# EAGLE board Trilife_5 (EAGLE 6.1)
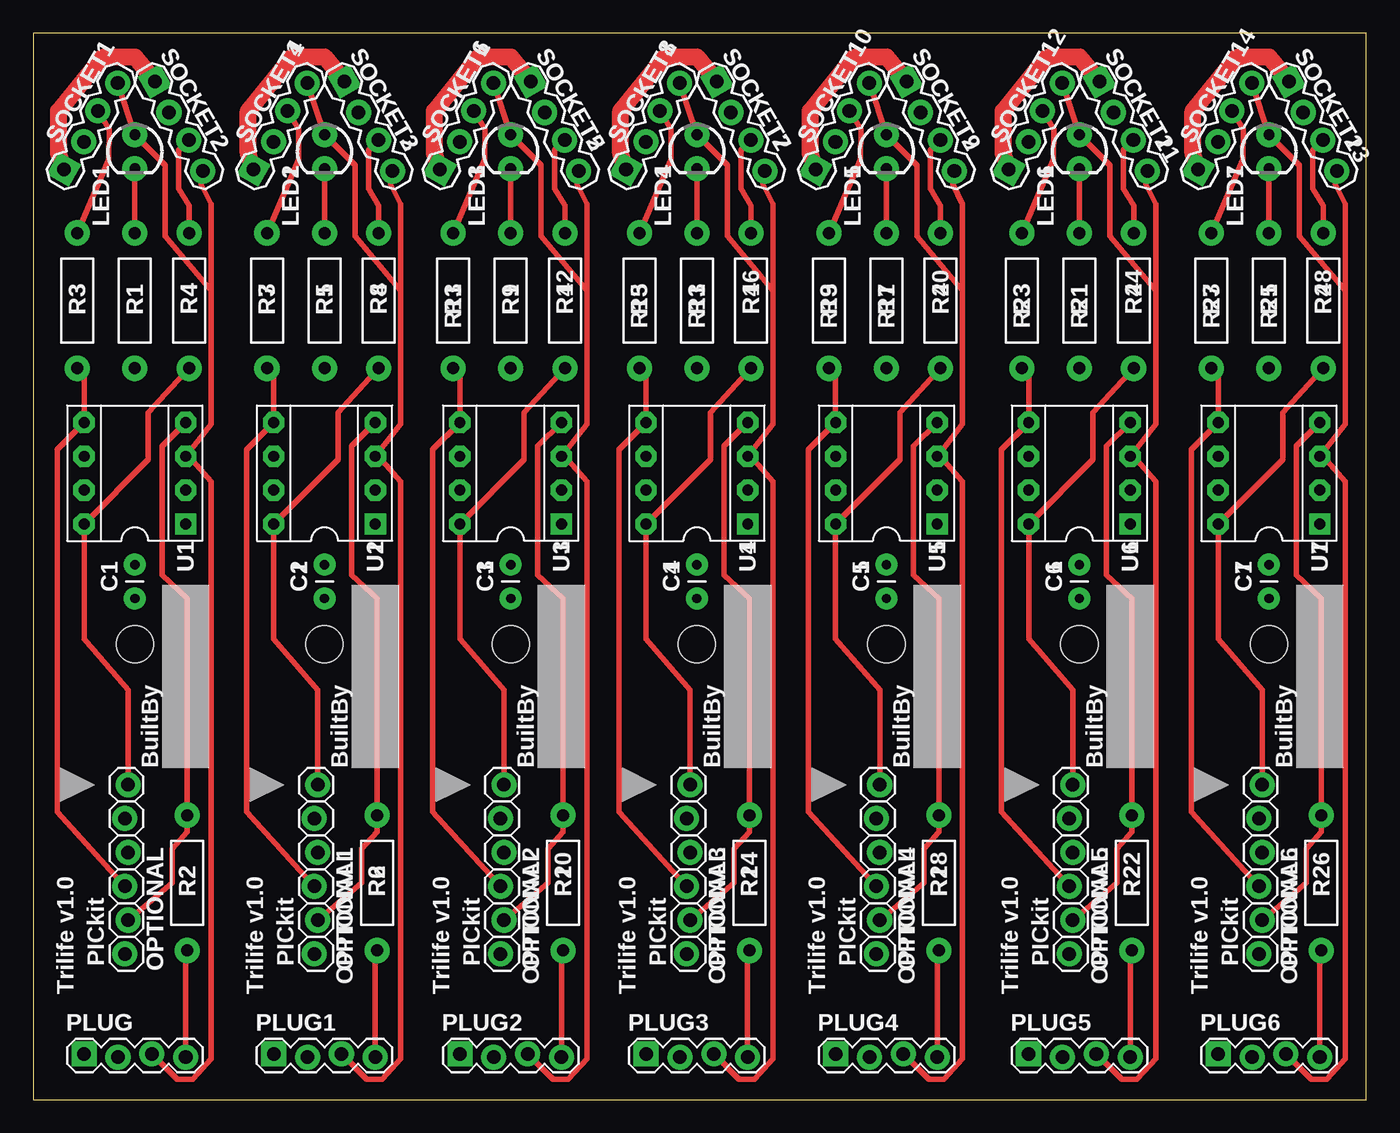
[diagram p0: board, top side]
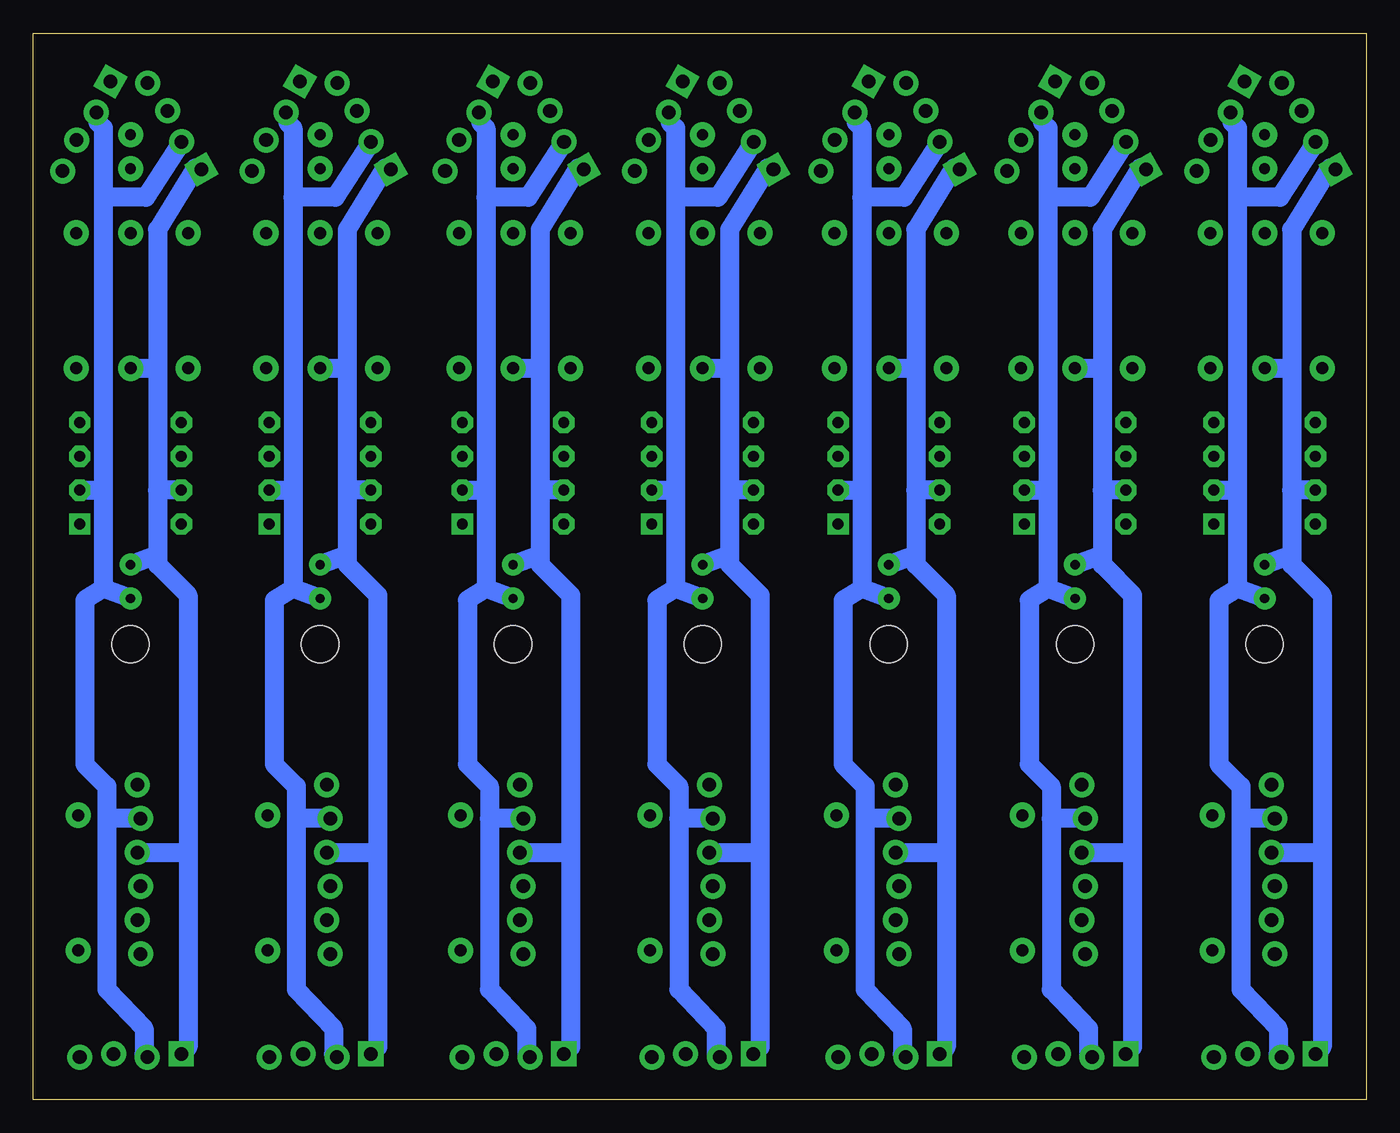
[diagram p1: board, bottom side, seen from below]

Size 100 x 80 mm. Coordinates in mm from the lower left corner, seen from the top.
Outline: 0,0 100,0 100,80 0,80 0,0
Copper layers (1*16): Top 0.035mm / dielectric 1.5mm / Bottom 0.035mm
Design rules: minimum track width 10mil, minimum drill 24mil, track to track 8mil, track to pad 8mil, pad to pad 8mil, via to via 8mil, smd to smd 8mil, copper to edge 40mil, drill to drill 8mil, minimum pad ring 10mil, minimum via ring 8mil, stop-mask expansion 4mil, vias tented up to drill 0mil, thermal gap 10mil
Holes 2.8 mm at 7.62,34.16 21.84,34.16 35.81,34.16 49.78,34.16 64.01,34.16 78.49,34.16 92.71,34.16

## Footprints (pad centres in the part's own frame; a part is rotated, then mirrored left to right if it is on the bottom)
CAP-PTH-SMALL = drill 0.7 pad 1.651: 1 0,0; 2 2.54,0
LED3MM = drill 0.813 pad 1.88: A -1.27,0; K 1.27,0
1X06_LOCK = drill 1.016 pad 1.88: 1 0,0; 2 2.54,-0.254; 3 5.08,0; 4 7.62,-0.254; 5 10.16,0; 6 12.7,-0.254
1X04_LOCK = drill 1.016 pad 1.88 square: 1 0,0.127 | drill 1.016 pad 1.88: 2 2.54,-0.127; 3 5.08,0.127; 4 7.62,-0.127
AXIAL-0.4 = drill 0.9 pad 1.88: P$1 -5.08,0; P$2 5.08,0
DIP-8 = drill 0.813 pad 1.6 square: 1 -3.81,3.81 | drill 0.813 pad 1.6 octagon: 2 -3.81,1.27; 3 -3.81,-1.27; 4 -3.81,-3.81; 5 3.81,-3.81; 6 3.81,-1.27; 7 3.81,1.27; 8 3.81,3.81

## Placement (x,y rotation side)
C1  [CAP-PTH-SMALL]  7.62,37.59 90 top
C2  [CAP-PTH-SMALL]  21.84,37.59 90 top
C3  [CAP-PTH-SMALL]  35.81,37.59 90 top
C4  [CAP-PTH-SMALL]  49.78,37.59 90 top
C5  [CAP-PTH-SMALL]  64.01,37.59 90 top
C6  [CAP-PTH-SMALL]  78.49,37.59 90 top
C7  [CAP-PTH-SMALL]  92.71,37.59 90 top
LED1  [LED3MM]  7.62,71.12 270 top
LED2  [LED3MM]  21.84,71.12 270 top
LED3  [LED3MM]  35.81,71.12 270 top
LED4  [LED3MM]  49.78,71.12 270 top
LED5  [LED3MM]  64.01,71.12 270 top
LED6  [LED3MM]  78.49,71.12 270 top
LED7  [LED3MM]  92.71,71.12 270 top
OPTIONAL  [1X06_LOCK]  7.11,23.62 270 top
OPTIONAL1  [1X06_LOCK]  21.34,23.62 270 top
OPTIONAL2  [1X06_LOCK]  35.31,23.62 270 top
OPTIONAL3  [1X06_LOCK]  49.28,23.62 270 top
OPTIONAL4  [1X06_LOCK]  63.5,23.62 270 top
OPTIONAL5  [1X06_LOCK]  77.98,23.62 270 top
OPTIONAL6  [1X06_LOCK]  92.2,23.62 270 top
PLUG  [1X04_LOCK]  3.81,3.3 0 top
PLUG1  [1X04_LOCK]  18.03,3.3 0 top
PLUG2  [1X04_LOCK]  32,3.3 0 top
PLUG3  [1X04_LOCK]  45.97,3.3 0 top
PLUG4  [1X04_LOCK]  60.2,3.3 0 top
PLUG5  [1X04_LOCK]  74.68,3.3 0 top
PLUG6  [1X04_LOCK]  88.9,3.3 0 top
R1  [AXIAL-0.4]  7.62,59.94 270 top
R2  [AXIAL-0.4]  11.56,16.26 90 top
R3  [AXIAL-0.4]  3.3,59.94 270 top
R4  [AXIAL-0.4]  11.68,59.94 90 top
R5  [AXIAL-0.4]  21.84,59.94 270 top
R6  [AXIAL-0.4]  25.78,16.26 90 top
R7  [AXIAL-0.4]  17.53,59.94 270 top
R8  [AXIAL-0.4]  25.91,59.94 90 top
R9  [AXIAL-0.4]  35.81,59.94 270 top
R10  [AXIAL-0.4]  39.75,16.26 90 top
R11  [AXIAL-0.4]  31.5,59.94 270 top
R12  [AXIAL-0.4]  39.88,59.94 90 top
R13  [AXIAL-0.4]  49.78,59.94 270 top
R14  [AXIAL-0.4]  53.72,16.26 90 top
R15  [AXIAL-0.4]  45.47,59.94 270 top
R16  [AXIAL-0.4]  53.85,59.94 90 top
R17  [AXIAL-0.4]  64.01,59.94 270 top
R18  [AXIAL-0.4]  67.94,16.26 90 top
R19  [AXIAL-0.4]  59.69,59.94 270 top
R20  [AXIAL-0.4]  68.07,59.94 90 top
R21  [AXIAL-0.4]  78.49,59.94 270 top
R22  [AXIAL-0.4]  82.42,16.26 90 top
R23  [AXIAL-0.4]  74.17,59.94 270 top
R24  [AXIAL-0.4]  82.55,59.94 90 top
R25  [AXIAL-0.4]  92.71,59.94 270 top
R26  [AXIAL-0.4]  96.65,16.26 90 top
R27  [AXIAL-0.4]  88.39,59.94 270 top
R28  [AXIAL-0.4]  96.77,59.94 90 top
SOCKET1  [1X04_LOCK]  2.41,69.72 60 top
SOCKET2  [1X04_LOCK]  9.02,76.33 300 top
SOCKET3  [1X04_LOCK]  23.24,76.33 300 top
SOCKET4  [1X04_LOCK]  16.64,69.72 60 top
SOCKET5  [1X04_LOCK]  37.21,76.33 300 top
SOCKET6  [1X04_LOCK]  30.61,69.72 60 top
SOCKET7  [1X04_LOCK]  51.18,76.33 300 top
SOCKET8  [1X04_LOCK]  44.58,69.72 60 top
SOCKET9  [1X04_LOCK]  65.41,76.33 300 top
SOCKET10  [1X04_LOCK]  58.8,69.72 60 top
SOCKET11  [1X04_LOCK]  79.88,76.33 300 top
SOCKET12  [1X04_LOCK]  73.28,69.72 60 top
SOCKET13  [1X04_LOCK]  94.11,76.33 300 top
SOCKET14  [1X04_LOCK]  87.5,69.72 60 top
U1  PIC10F322P  [DIP-8]  7.62,46.99 180 top
U2  PIC10F322P  [DIP-8]  21.84,46.99 180 top
U3  PIC10F322P  [DIP-8]  35.81,46.99 180 top
U4  PIC10F322P  [DIP-8]  49.78,46.99 180 top
U5  PIC10F322P  [DIP-8]  64.01,46.99 180 top
U6  PIC10F322P  [DIP-8]  78.49,46.99 180 top
U7  PIC10F322P  [DIP-8]  92.71,46.99 180 top

## Library data of the parts
C1-C7 LED1-LED7 PLUG PLUG1-PLUG6 R1-R28 SOCKET1-SOCKET14 = SparkFun
OPTIONAL OPTIONAL1-OPTIONAL6 U1-U7 = CindysStuff

## Nets
5V: C1.1 OPTIONAL.2 PLUG.2 SOCKET1.2 SOCKET2.2 U1.2
5V1: C2.1 OPTIONAL1.2 PLUG1.2 SOCKET3.2 SOCKET4.2 U2.2
5V2: C3.1 OPTIONAL2.2 PLUG2.2 SOCKET5.2 SOCKET6.2 U3.2
5V3: C4.1 OPTIONAL3.2 PLUG3.2 SOCKET7.2 SOCKET8.2 U4.2
5V4: C5.1 OPTIONAL4.2 PLUG4.2 SOCKET9.2 SOCKET10.2 U5.2
5V5: C6.1 OPTIONAL5.2 PLUG5.2 SOCKET11.2 SOCKET12.2 U6.2
5V6: C7.1 OPTIONAL6.2 PLUG6.2 SOCKET13.2 SOCKET14.2 U7.2
GND: C1.2 OPTIONAL.3 PLUG.1 R1.P$2 SOCKET1.1 SOCKET2.1 U1.7
GND1: C2.2 OPTIONAL1.3 PLUG1.1 R5.P$2 SOCKET3.1 SOCKET4.1 U2.7
GND2: C3.2 OPTIONAL2.3 PLUG2.1 R9.P$2 SOCKET5.1 SOCKET6.1 U3.7
GND3: C4.2 OPTIONAL3.3 PLUG3.1 R13.P$2 SOCKET7.1 SOCKET8.1 U4.7
GND4: C5.2 OPTIONAL4.3 PLUG4.1 R17.P$2 SOCKET9.1 SOCKET10.1 U5.7
GND5: C6.2 OPTIONAL5.3 PLUG5.1 R21.P$2 SOCKET11.1 SOCKET12.1 U6.7
GND6: C7.2 OPTIONAL6.3 PLUG6.1 R25.P$2 SOCKET13.1 SOCKET14.1 U7.7
N$1: LED1.A PLUG.3 SOCKET1.4 SOCKET2.4 U1.3
N$2: LED1.K R1.P$1
N$3: OPTIONAL.1 R4.P$1 U1.8
N$4: OPTIONAL.4 R3.P$2 U1.5
N$5: OPTIONAL.5 R2.P$2 U1.4
N$6: R4.P$2 SOCKET2.3
N$7: OPTIONAL1.1 R8.P$1 U2.8
N$8: R3.P$1 SOCKET1.3
N$9: PLUG.4 R2.P$1
N$10: OPTIONAL1.4 R7.P$2 U2.5
N$11: OPTIONAL1.5 R6.P$2 U2.4
N$12: LED2.A PLUG1.3 SOCKET3.4 SOCKET4.4 U2.3
N$13: LED2.K R5.P$1
N$14: R8.P$2 SOCKET3.3
N$15: R7.P$1 SOCKET4.3
N$16: PLUG1.4 R6.P$1
N$17: OPTIONAL2.1 R12.P$1 U3.8
N$18: OPTIONAL2.4 R11.P$2 U3.5
N$19: OPTIONAL2.5 R10.P$2 U3.4
N$20: LED3.A PLUG2.3 SOCKET5.4 SOCKET6.4 U3.3
N$21: LED3.K R9.P$1
N$22: R12.P$2 SOCKET5.3
N$23: R11.P$1 SOCKET6.3
N$24: PLUG2.4 R10.P$1
N$25: OPTIONAL3.1 R16.P$1 U4.8
N$26: OPTIONAL3.4 R15.P$2 U4.5
N$27: OPTIONAL3.5 R14.P$2 U4.4
N$28: LED4.A PLUG3.3 SOCKET7.4 SOCKET8.4 U4.3
N$29: LED4.K R13.P$1
N$30: R16.P$2 SOCKET7.3
N$31: R15.P$1 SOCKET8.3
N$32: PLUG3.4 R14.P$1
N$33: OPTIONAL4.1 R20.P$1 U5.8
N$34: OPTIONAL4.4 R19.P$2 U5.5
N$35: OPTIONAL4.5 R18.P$2 U5.4
N$36: LED5.A PLUG4.3 SOCKET9.4 SOCKET10.4 U5.3
N$37: LED5.K R17.P$1
N$38: R20.P$2 SOCKET9.3
N$39: R19.P$1 SOCKET10.3
N$40: PLUG4.4 R18.P$1
N$41: OPTIONAL5.1 R24.P$1 U6.8
N$42: OPTIONAL5.4 R23.P$2 U6.5
N$43: OPTIONAL5.5 R22.P$2 U6.4
N$44: LED6.A PLUG5.3 SOCKET11.4 SOCKET12.4 U6.3
N$45: LED6.K R21.P$1
N$46: R24.P$2 SOCKET11.3
N$47: R23.P$1 SOCKET12.3
N$48: PLUG5.4 R22.P$1
N$49: OPTIONAL6.1 R28.P$1 U7.8
N$50: OPTIONAL6.4 R27.P$2 U7.5
N$51: OPTIONAL6.5 R26.P$2 U7.4
N$52: LED7.A PLUG6.3 SOCKET13.4 SOCKET14.4 U7.3
N$53: LED7.K R25.P$1
N$54: R28.P$2 SOCKET13.3
N$55: R27.P$1 SOCKET14.3
N$56: PLUG6.4 R26.P$1

## Tracks (layer width: path | path; a pad name or v marks a point on that pad's centre or on a via)
5V
  Bottom 1.422: SOCKET2.2 10.05,73.3 9.65,72.9 9.65,67.69 | 9.65,67.69 9.65,45.72 | 9.65,45.72 9.65,38.35 | SOCKET1.2 6.48,67.69 9.65,67.69 | U1.2 9.65,45.72 | C1.1 9.65,38.35 | 9.65,38.35 11.05,37.47 11.05,25.15 9.4,23.5 9.4,21.08 | 9.4,21.08 9.4,8.26 6.6,5.33 6.6,3.43 PLUG.2 | OPTIONAL.2 9.4,21.08
5V1
  Bottom 1.422: SOCKET3.2 24.27,73.3 23.88,72.9 23.88,67.69 | 23.88,67.69 23.88,45.72 | 23.88,45.72 23.88,38.35 | SOCKET4.2 20.7,67.69 23.88,67.69 | U2.2 23.88,45.72 | C2.1 23.88,38.35 | 23.88,38.35 25.27,37.47 25.27,25.15 23.62,23.5 23.62,21.08 | 23.62,21.08 23.62,8.26 20.83,5.33 20.83,3.43 PLUG1.2 | OPTIONAL1.2 23.62,21.08
5V2
  Bottom 1.422: SOCKET5.2 38.24,73.3 37.85,72.9 37.85,67.69 | 37.85,67.69 37.85,45.72 | 37.85,45.72 37.85,38.35 | SOCKET6.2 34.67,67.69 37.85,67.69 | U3.2 37.85,45.72 | C3.1 37.85,38.35 | 37.85,38.35 39.24,37.47 39.24,25.15 37.59,23.5 37.59,21.08 | 37.59,21.08 37.59,8.26 34.8,5.33 34.8,3.43 PLUG2.2 | OPTIONAL2.2 37.59,21.08
5V3
  Bottom 1.422: SOCKET7.2 52.21,73.3 51.82,72.9 51.82,67.69 | 51.82,67.69 51.82,45.72 | 51.82,45.72 51.82,38.35 | SOCKET8.2 48.64,67.69 51.82,67.69 | U4.2 51.82,45.72 | C4.1 51.82,38.35 | 51.82,38.35 53.21,37.47 53.21,25.15 51.56,23.5 51.56,21.08 | 51.56,21.08 51.56,8.26 48.77,5.33 48.77,3.43 PLUG3.2 | OPTIONAL3.2 51.56,21.08
5V4
  Bottom 1.422: SOCKET9.2 66.44,73.3 66.04,72.9 66.04,67.69 | 66.04,67.69 66.04,45.72 | 66.04,45.72 66.04,38.35 | SOCKET10.2 62.87,67.69 66.04,67.69 | U5.2 66.04,45.72 | C5.1 66.04,38.35 | 66.04,38.35 67.44,37.47 67.44,25.15 65.79,23.5 65.79,21.08 | 65.79,21.08 65.79,8.26 62.99,5.33 62.99,3.43 PLUG4.2 | OPTIONAL4.2 65.79,21.08
5V5
  Bottom 1.422: SOCKET11.2 80.92,73.3 80.52,72.9 80.52,67.69 | 80.52,67.69 80.52,45.72 | 80.52,45.72 80.52,38.35 | SOCKET12.2 77.34,67.69 80.52,67.69 | U6.2 80.52,45.72 | C6.1 80.52,38.35 | 80.52,38.35 81.92,37.47 81.92,25.15 80.26,23.5 80.26,21.08 | 80.26,21.08 80.26,8.26 77.47,5.33 77.47,3.43 PLUG5.2 | OPTIONAL5.2 80.26,21.08
5V6
  Bottom 1.422: SOCKET13.2 95.14,73.3 94.74,72.9 94.74,67.69 | 94.74,67.69 94.74,45.72 | 94.74,45.72 94.74,38.35 | SOCKET14.2 91.57,67.69 94.74,67.69 | U7.2 94.74,45.72 | C7.1 94.74,38.35 | 94.74,38.35 96.14,37.47 96.14,25.15 94.49,23.5 94.49,21.08 | 94.49,21.08 94.49,8.26 91.69,5.33 91.69,3.43 PLUG6.2 | OPTIONAL6.2 94.49,21.08
GND
  Top 1.27: SOCKET1.1 1.91,70.99 1.91,74.17 5.08,78.11 5.33,78.23 7.62,78.23 SOCKET2.1
  Bottom 1.422: SOCKET1.1 2.73,69.91 5.59,65.28 5.59,54.86 | 5.59,54.86 5.59,45.72 | 5.59,45.72 5.59,40.89 | U1.7 5.59,45.72 | R1.P$2 5.59,54.86 | C1.2 5.59,40.89 | 5.59,40.89 5.59,40.13 3.3,37.85 3.3,18.54 | 3.3,18.54 3.3,3.94 PLUG.1 | OPTIONAL.3 3.3,18.54
GND1
  Top 1.27: SOCKET4.1 16.13,70.99 16.13,74.17 19.3,78.11 19.56,78.23 21.84,78.23 SOCKET3.1
  Bottom 1.422: SOCKET4.1 16.95,69.91 19.81,65.28 19.81,54.86 | 19.81,54.86 19.81,45.72 | 19.81,45.72 19.81,40.89 | U2.7 19.81,45.72 | R5.P$2 19.81,54.86 | C2.2 19.81,40.89 | 19.81,40.89 19.81,40.13 17.53,37.85 17.53,18.54 | 17.53,18.54 17.53,3.94 PLUG1.1 | OPTIONAL1.3 17.53,18.54
GND2
  Top 1.27: SOCKET6.1 30.1,70.99 30.1,74.17 33.27,78.11 33.53,78.23 35.81,78.23 SOCKET5.1
  Bottom 1.422: SOCKET6.1 30.92,69.91 33.78,65.28 33.78,54.86 | 33.78,54.86 33.78,45.72 | 33.78,45.72 33.78,40.89 | U3.7 33.78,45.72 | R9.P$2 33.78,54.86 | C3.2 33.78,40.89 | 33.78,40.89 33.78,40.13 31.5,37.85 31.5,18.54 | 31.5,18.54 31.5,3.94 PLUG2.1 | OPTIONAL2.3 31.5,18.54
GND3
  Top 1.27: SOCKET8.1 44.07,70.99 44.07,74.17 47.24,78.11 47.5,78.23 49.78,78.23 SOCKET7.1
  Bottom 1.422: SOCKET8.1 44.9,69.91 47.75,65.28 47.75,54.86 | 47.75,54.86 47.75,45.72 | 47.75,45.72 47.75,40.89 | U4.7 47.75,45.72 | R13.P$2 47.75,54.86 | C4.2 47.75,40.89 | 47.75,40.89 47.75,40.13 45.47,37.85 45.47,18.54 | 45.47,18.54 45.47,3.94 PLUG3.1 | OPTIONAL3.3 45.47,18.54
GND4
  Top 1.27: SOCKET10.1 58.29,70.99 58.29,74.17 61.47,78.11 61.72,78.23 64.01,78.23 SOCKET9.1
  Bottom 1.422: SOCKET10.1 59.12,69.91 61.98,65.28 61.98,54.86 | 61.98,54.86 61.98,45.72 | 61.98,45.72 61.98,40.89 | U5.7 61.98,45.72 | R17.P$2 61.98,54.86 | C5.2 61.98,40.89 | 61.98,40.89 61.98,40.13 59.69,37.85 59.69,18.54 | 59.69,18.54 59.69,3.94 PLUG4.1 | OPTIONAL4.3 59.69,18.54
GND5
  Top 1.27: SOCKET12.1 72.77,70.99 72.77,74.17 75.95,78.11 76.2,78.23 78.49,78.23 SOCKET11.1
  Bottom 1.422: SOCKET12.1 73.6,69.91 76.45,65.28 76.45,54.86 | 76.45,54.86 76.45,45.72 | 76.45,45.72 76.45,40.89 | U6.7 76.45,45.72 | R21.P$2 76.45,54.86 | C6.2 76.45,40.89 | 76.45,40.89 76.45,40.13 74.17,37.85 74.17,18.54 | 74.17,18.54 74.17,3.94 PLUG5.1 | OPTIONAL5.3 74.17,18.54
GND6
  Top 1.27: SOCKET14.1 87,70.99 87,74.17 90.17,78.11 90.42,78.23 92.71,78.23 SOCKET13.1
  Bottom 1.422: SOCKET14.1 87.82,69.91 90.68,65.28 90.68,54.86 | 90.68,54.86 90.68,45.72 | 90.68,45.72 90.68,40.89 | U7.7 90.68,45.72 | R25.P$2 90.68,54.86 | C7.2 90.68,40.89 | 90.68,40.89 90.68,40.13 88.39,37.85 88.39,18.54 | 88.39,18.54 88.39,3.94 PLUG6.1 | OPTIONAL6.3 88.39,18.54
N$1
  Top 0.406: SOCKET1.4 LED1.A 9.91,70.1 9.91,64.77 13.34,60.71 | SOCKET2.4 12.59,68.69 13.34,67.18 13.34,60.71 | 13.34,60.71 13.34,50.67 U1.3 11.68,48.26 13.34,46.35 13.34,3.05 11.94,1.52 10.79,1.52 PLUG.3
N$2
  Top 0.406: R1.P$1 LED1.K
N$3
  Top 0.406: R4.P$1 8.64,51.56 8.64,48.01 U1.8 3.81,34.54 7.11,30.73 OPTIONAL.1
N$4
  Top 0.406: OPTIONAL.4 1.78,21.59 1.78,48.77 U1.5 4.06,50.8 3.81,51.05 3.81,54.36 R3.P$2
N$5
  Top 0.406: U1.4 9.65,49.02 9.65,39.37 11.56,37.59 R2.P$2 11.56,20.07 10.41,18.8 10.41,16.26 OPTIONAL.5
N$6
  Top 0.406: R4.P$2 11.68,67.06 10.92,68.33 10.92,71.25 SOCKET2.3
N$7
  Top 0.406: R8.P$1 22.86,51.56 22.86,48.01 U2.8 18.03,34.54 21.34,30.73 OPTIONAL1.1
N$8
  Top 0.406: R3.P$1 5.66,70.51 5.69,72.8 SOCKET1.3
N$9
  Top 0.406: PLUG.4 11.43,11.18 11.94,11.05 R2.P$1
N$10
  Top 0.406: OPTIONAL1.4 16,21.59 16,48.77 U2.5 18.29,50.8 18.03,51.05 18.03,54.36 R7.P$2
N$11
  Top 0.406: U2.4 23.88,49.02 23.88,39.37 25.78,37.59 R6.P$2 25.78,20.07 24.64,18.8 24.64,16.26 OPTIONAL1.5
N$12
  Top 0.406: SOCKET4.4 LED2.A 24.13,70.1 24.13,64.77 27.56,60.71 | SOCKET3.4 26.81,68.69 27.56,67.18 27.56,60.71 | 27.56,60.71 27.56,50.67 U2.3 25.91,48.26 27.56,46.35 27.56,3.05 26.16,1.52 25.02,1.52 PLUG1.3
N$13
  Top 0.406: R5.P$1 LED2.K
N$14
  Top 0.406: R8.P$2 25.91,67.06 25.15,68.33 25.15,71.25 SOCKET3.3
N$15
  Top 0.406: R7.P$1 19.89,70.51 19.91,72.8 SOCKET4.3
N$16
  Top 0.406: PLUG1.4 25.65,11.18 26.16,11.05 R6.P$1
N$17
  Top 0.406: R12.P$1 36.83,51.56 36.83,48.01 U3.8 32,34.54 35.31,30.73 OPTIONAL2.1
N$18
  Top 0.406: OPTIONAL2.4 29.97,21.59 29.97,48.77 U3.5 32.26,50.8 32,51.05 32,54.36 R11.P$2
N$19
  Top 0.406: U3.4 37.85,49.02 37.85,39.37 39.75,37.59 R10.P$2 39.75,20.07 38.61,18.8 38.61,16.26 OPTIONAL2.5
N$20
  Top 0.406: SOCKET6.4 LED3.A 38.1,70.1 38.1,64.77 41.53,60.71 | SOCKET5.4 40.78,68.69 41.53,67.18 41.53,60.71 | 41.53,60.71 41.53,50.67 U3.3 39.88,48.26 41.53,46.35 41.53,3.05 40.13,1.52 38.99,1.52 PLUG2.3
N$21
  Top 0.406: R9.P$1 LED3.K
N$22
  Top 0.406: R12.P$2 39.88,67.06 39.12,68.33 39.12,71.25 SOCKET5.3
N$23
  Top 0.406: R11.P$1 33.86,70.51 33.88,72.8 SOCKET6.3
N$24
  Top 0.406: PLUG2.4 39.62,11.18 40.13,11.05 R10.P$1
N$25
  Top 0.406: R16.P$1 50.8,51.56 50.8,48.01 U4.8 45.97,34.54 49.28,30.73 OPTIONAL3.1
N$26
  Top 0.406: OPTIONAL3.4 43.94,21.59 43.94,48.77 U4.5 46.23,50.8 45.97,51.05 45.97,54.36 R15.P$2
N$27
  Top 0.406: U4.4 51.82,49.02 51.82,39.37 53.72,37.59 R14.P$2 53.72,20.07 52.58,18.8 52.58,16.26 OPTIONAL3.5
N$28
  Top 0.406: SOCKET8.4 LED4.A 52.07,70.1 52.07,64.77 55.5,60.71 | SOCKET7.4 54.75,68.69 55.5,67.18 55.5,60.71 | 55.5,60.71 55.5,50.67 U4.3 53.85,48.26 55.5,46.35 55.5,3.05 54.1,1.52 52.96,1.52 PLUG3.3
N$29
  Top 0.406: R13.P$1 LED4.K
N$30
  Top 0.406: R16.P$2 53.85,67.06 53.09,68.33 53.09,71.25 SOCKET7.3
N$31
  Top 0.406: R15.P$1 47.83,70.51 47.85,72.8 SOCKET8.3
N$32
  Top 0.406: PLUG3.4 53.59,11.18 54.1,11.05 R14.P$1
N$33
  Top 0.406: R20.P$1 65.02,51.56 65.02,48.01 U5.8 60.2,34.54 63.5,30.73 OPTIONAL4.1
N$34
  Top 0.406: OPTIONAL4.4 58.17,21.59 58.17,48.77 U5.5 60.45,50.8 60.2,51.05 60.2,54.36 R19.P$2
N$35
  Top 0.406: U5.4 66.04,49.02 66.04,39.37 67.94,37.59 R18.P$2 67.94,20.07 66.8,18.8 66.8,16.26 OPTIONAL4.5
N$36
  Top 0.406: SOCKET10.4 LED5.A 66.29,70.1 66.29,64.77 69.72,60.71 | SOCKET9.4 68.98,68.69 69.72,67.18 69.72,60.71 | 69.72,60.71 69.72,50.67 U5.3 68.07,48.26 69.72,46.35 69.72,3.05 68.33,1.52 67.18,1.52 PLUG4.3
N$37
  Top 0.406: R17.P$1 LED5.K
N$38
  Top 0.406: R20.P$2 68.07,67.06 67.31,68.33 67.31,71.25 SOCKET9.3
N$39
  Top 0.406: R19.P$1 62.05,70.51 62.08,72.8 SOCKET10.3
N$40
  Top 0.406: PLUG4.4 67.82,11.18 68.33,11.05 R18.P$1
N$41
  Top 0.406: R24.P$1 79.5,51.56 79.5,48.01 U6.8 74.68,34.54 77.98,30.73 OPTIONAL5.1
N$42
  Top 0.406: OPTIONAL5.4 72.64,21.59 72.64,48.77 U6.5 74.93,50.8 74.68,51.05 74.68,54.36 R23.P$2
N$43
  Top 0.406: U6.4 80.52,49.02 80.52,39.37 82.42,37.59 R22.P$2 82.42,20.07 81.28,18.8 81.28,16.26 OPTIONAL5.5
N$44
  Top 0.406: SOCKET12.4 LED6.A 80.77,70.1 80.77,64.77 84.2,60.71 | SOCKET11.4 83.46,68.69 84.2,67.18 84.2,60.71 | 84.2,60.71 84.2,50.67 U6.3 82.55,48.26 84.2,46.35 84.2,3.05 82.8,1.52 81.66,1.52 PLUG5.3
N$45
  Top 0.406: R21.P$1 LED6.K
N$46
  Top 0.406: R24.P$2 82.55,67.06 81.79,68.33 81.79,71.25 SOCKET11.3
N$47
  Top 0.406: R23.P$1 76.53,70.51 76.56,72.8 SOCKET12.3
N$48
  Top 0.406: PLUG5.4 82.3,11.18 82.8,11.05 R22.P$1
N$49
  Top 0.406: R28.P$1 93.73,51.56 93.73,48.01 U7.8 88.9,34.54 92.2,30.73 OPTIONAL6.1
N$50
  Top 0.406: OPTIONAL6.4 86.87,21.59 86.87,48.77 U7.5 89.15,50.8 88.9,51.05 88.9,54.36 R27.P$2
N$51
  Top 0.406: U7.4 94.74,49.02 94.74,39.37 96.65,37.59 R26.P$2 96.65,20.07 95.5,18.8 95.5,16.26 OPTIONAL6.5
N$52
  Top 0.406: SOCKET14.4 LED7.A 95,70.1 95,64.77 98.42,60.71 | SOCKET13.4 97.68,68.69 98.42,67.18 98.42,60.71 | 98.42,60.71 98.42,50.67 U7.3 96.77,48.26 98.42,46.35 98.42,3.05 97.03,1.52 95.89,1.52 PLUG6.3
N$53
  Top 0.406: R25.P$1 LED7.K
N$54
  Top 0.406: R28.P$2 96.77,67.06 96.01,68.33 96.01,71.25 SOCKET13.3
N$55
  Top 0.406: R27.P$1 90.75,70.51 90.78,72.8 SOCKET14.3
N$56
  Top 0.406: PLUG6.4 96.52,11.18 97.03,11.05 R26.P$1

## Text on the board
tPlace: BuiltBy | BuiltBy | BuiltBy | BuiltBy | BuiltBy | BuiltBy | BuiltBy | PICkit | PICkit | PICkit | PICkit | PICkit | PICkit | PICkit | Trilife v1.0 | Trilife v1.0 | Trilife v1.0 | Trilife v1.0 | Trilife v1.0 | Trilife v1.0 | Trilife v1.0
_tNames: SOCKET2 | SOCKET2 | SOCKET2 | SOCKET2 | SOCKET2 | SOCKET2 | SOCKET2 | SOCKET1 | SOCKET1 | SOCKET1 | SOCKET1 | SOCKET1 | SOCKET1 | SOCKET1 | LED1 | LED1 | LED1 | LED1 | LED1 | LED1 | LED1 | R3 | R1 | R3 | R1 | R3 | R1 | R3 | R1 | R3 | R1 | R3 | R1 | R3 | R1 | R4 | R4 | R4 | R4 | R4 | R4 | R4 | U1 | U1 | U1 | U1 | U1 | U1 | U1 | C1 | C1 | C1 | C1 | C1 | C1 | C1 | OPTIONAL | OPTIONAL | OPTIONAL | OPTIONAL | OPTIONAL | OPTIONAL | OPTIONAL | R2 | R2 | R2 | R2 | R2 | R2 | R2 | PLUG | PLUG | PLUG | PLUG | PLUG | PLUG | PLUG